# EAGLE board freeduino-dual-motor-driver (EAGLE 4.16)
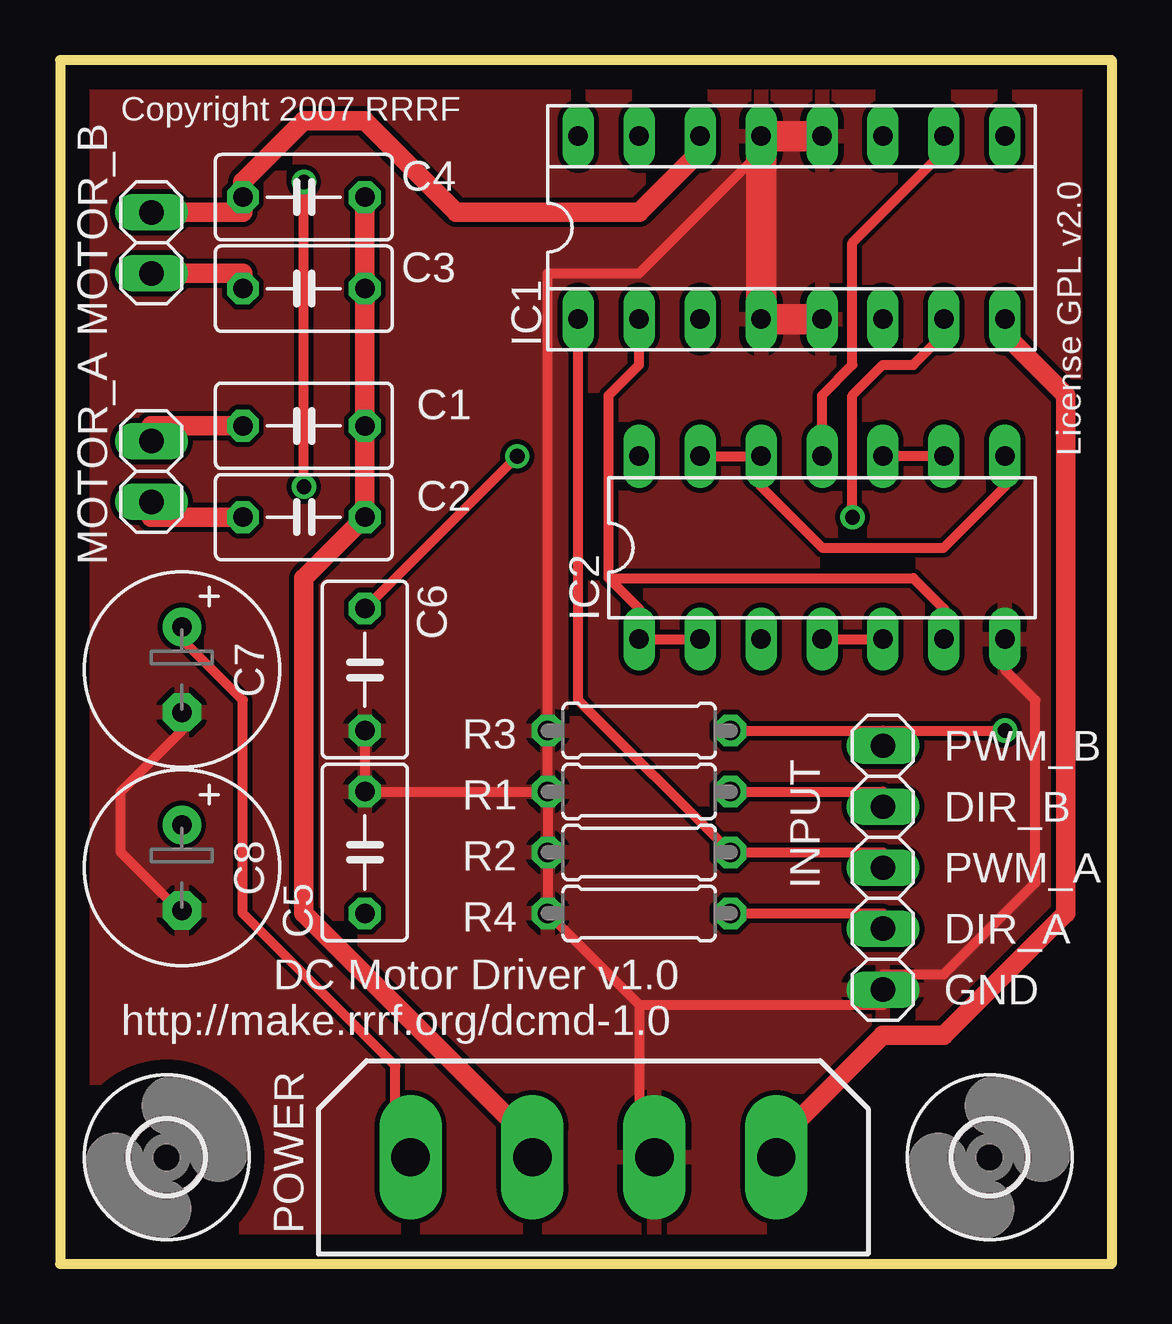
[diagram p0: board, top side]
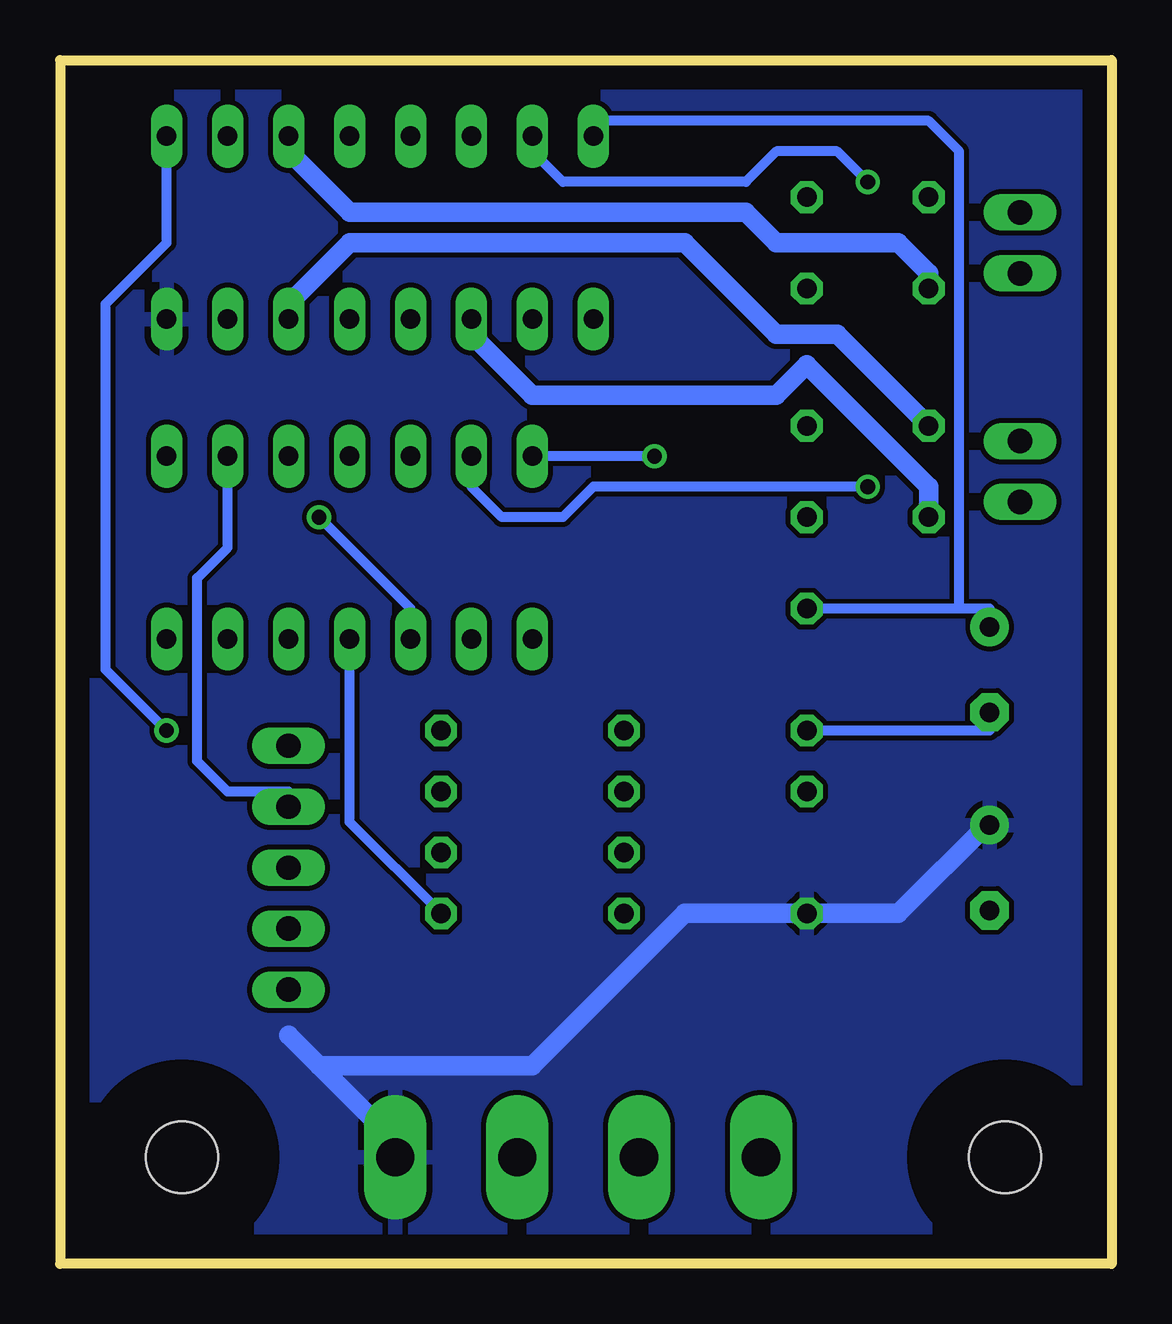
[diagram p1: board, bottom side, seen from below]

Size 43.82 x 50.16 mm. Coordinates in mm from the lower left corner, seen from the top.
Outline: 43.82,50.16 0,50.16 0,0 43.82,0 43.82,50.16
Copper layers (1*16): Top 0.035mm / dielectric 1.5mm / Bottom 0.035mm
Design rules "default": minimum track width 10mil, minimum drill 24mil, track to track 8mil, track to pad 8mil, pad to pad 8mil, via to via 8mil, smd to smd 8mil, copper to edge 40mil, drill to drill 8mil, minimum pad ring 10mil, minimum via ring 8mil, stop-mask expansion 4mil, vias tented up to drill 0mil, thermal gap 10mil
Net classes: 0 default: width 0.406 mm, drill 0.381 mm; 1 power: width 0.813 mm, drill 0.381 mm

## Footprints (pad centres in the part's own frame; a part is rotated, then mirrored left to right if it is on the bottom)
C050-035X075 = drill 0.813 octagon: 1 -2.54,0; 2 2.54,0
E3,5-8 = drill 0.813 pad 1.6 round: + -1.778,0 | drill 0.813 pad 1.6 octagon: - 1.778,0
3,0 = hole 3: 0,0
SOCKED-16 = drill 0.813 long: 1 -8.89,-3.81; 2 -6.35,-3.81; 3 -3.81,-3.81; 4 -1.27,-3.81; 5 1.27,-3.81; 6 3.81,-3.81; 7 6.35,-3.81; 8 8.89,-3.81; 9 8.89,3.81; 10 6.35,3.81; 11 3.81,3.81; 12 1.27,3.81; 13 -1.27,3.81; 14 -3.81,3.81; 15 -6.35,3.81; 16 -8.89,3.81
DIL14 = drill 0.813 long: 1 -7.62,-3.81; 2 -5.08,-3.81; 3 -2.54,-3.81; 4 0,-3.81; 5 2.54,-3.81; 6 5.08,-3.81; 7 7.62,-3.81; 8 7.62,3.81; 9 5.08,3.81; 10 2.54,3.81; 11 0,3.81; 12 -2.54,3.81; 13 -5.08,3.81; 14 -7.62,3.81
1X05 = drill 1.016 long: 1 -5.08,0; 2 -2.54,0; 3 0,0; 4 2.54,0; 5 5.08,0
1X02 = drill 1.016 long: 1 -1.27,0; 2 1.27,0
9090-4V = drill 1.6 pad 2.6 long: 1 -7.62,0; 2 -2.54,0; 3 2.54,0; 4 7.62,0
0207/7 = drill 0.813 octagon: 1 -3.81,0; 2 3.81,0

## Placement (x,y rotation side)
C1  100nF  [C050-035X075]  10.16,34.92 0 top
C2  100nF  [C050-035X075]  10.16,31.11 0 top
C3  100nF  [C050-035X075]  10.16,40.64 0 top
C4  100nF  [C050-035X075]  10.16,44.45 0 top
C5  100nF  [C050-035X075]  12.7,17.14 90 top
C6  100nF  [C050-035X075]  12.7,24.77 270 top
C7  100uF  [E3,5-8]  5.08,24.77 270 top
C8  100uF  [E3,5-8]  5.08,16.51 270 top
H1  MOUNT-HOLE3.0  [3,0]  4.45,4.45 0 top
H2  MOUNT-HOLE3.0  [3,0]  38.73,4.45 0 top
IC1  L293D  [SOCKED-16]  30.48,43.18 0 top
IC2  74HC00N  [DIL14]  31.75,29.84 0 top
INPUT  [1X05]  34.29,16.51 90 top
MOTOR_A  [1X02]  3.81,33.02 90 top
MOTOR_B  [1X02]  3.81,42.55 90 top
POWER  9090-4V  [9090-4V]  22.23,4.45 0 top
R1  100K  [0207/7]  24.13,19.68 180 top
R2  100K  [0207/7]  24.13,17.14 180 top
R3  100K  [0207/7]  24.13,22.22 180 top
R4  100K  [0207/7]  24.13,14.6 180 top

## Library data of the parts
C1-C8 R1-R4 = rcl
H1 H2 = holes
IC1 = ic-package
IC2 = 74xx-eu
INPUT MOTOR_A MOTOR_B = pinhead
POWER = con-thomas-betts

## Nets
DIR_A: IC2.4 IC2.5 INPUT.2 R4.1
DIR_B: IC2.9 IC2.10 INPUT.4 R1.1
GND: C5.2 C6.2 C7.- C8.- IC1.4 IC1.5 IC1.12 IC1.13 IC2.7 INPUT.1 POWER.3 R1.2 R2.2 R3.2 R4.2
GNDA [power]: C1.2 C2.2 C3.2 C4.2 POWER.2
N$1: IC1.7 IC2.3
N$2: IC1.2 IC2.1 IC2.2 IC2.6
N$3: IC1.10 IC2.11
N$4: IC1.15 IC2.8 IC2.12 IC2.13
OUTA_1 [power]: C2.1 IC1.3 MOTOR_A.1
OUTA_2 [power]: C1.1 IC1.6 MOTOR_A.2
OUTB_1 [power]: C3.1 IC1.11 MOTOR_B.1
OUTB_2 [power]: C4.1 IC1.14 MOTOR_B.2
PWM_A: IC1.1 INPUT.3 R2.1
PWM_B: IC1.9 INPUT.5 R3.1
VCC: C6.1 C7.+ IC1.16 IC2.14 POWER.1
VSS [power]: C5.1 C8.+ IC1.8 POWER.4

## Tracks (layer width: path | path; a pad name or v marks a point on that pad's centre or on a via)
DIR_A
  Top 0.406: IC2.4 IC2.5 | R4.1 34.29,14.6 INPUT.2
  Bottom 0.406: R4.1 31.75,18.41 IC2.4
DIR_B
  Top 0.406: IC2.9 IC2.10 | R1.1 34.29,19.68 INPUT.4
  Bottom 0.406: IC2.9 36.83,29.84 38.1,28.57 38.1,20.95 36.83,19.68 34.29,19.68 INPUT.4
GND
  Top 0.406: IC2.7 39.37,24.77 40.64,23.49 40.64,15.88 36.83,12.06 34.29,12.06 INPUT.1 34.29,10.8 24.13,10.8 | C8.- 5.08,14.6 2.54,17.14 2.54,19.68 5.08,22.22 C7.- | R1.2 R3.2 20.32,41.27 24.13,41.27 29.21,46.35 | R1.2 C5.2 C6.2 | R1.2 R2.2 R4.2 24.13,10.8 | 24.13,10.8 24.13,5.71 POWER.3
  Top 1.27: IC1.12 IC1.13 29.21,46.35 IC1.4 IC1.5
  Bottom 0.406: C6.2 5.08,22.22 C7.-
  pour Top: 43.18,49.53 0.63,49.53 0.63,0.63 43.18,0.63
GNDA
  Top 0.813: C4.2 C3.2 C1.2 C2.2 10.16,28.57 10.16,14.6 19.05,5.71 POWER.2
N$1  (via drill 0.61)
  Top 0.406: v33.02,31.11 33.02,36.2 34.29,37.47 35.56,37.47 36.83,38.73 IC1.7
  Bottom 0.406: v33.02,31.11 29.21,27.3 IC2.3
N$2
  Top 0.406: IC2.2 IC2.1 24.13,27.3 22.86,28.57 | 22.86,28.57 22.86,36.2 24.13,37.47 IC1.2 | 22.86,28.57 35.56,28.57 36.83,27.3 IC2.6
N$3
  Top 0.406: IC2.11 31.75,36.2 33.02,37.47 33.02,42.55 36.83,46.35 IC1.10
N$4  (via drill 0.61)
  Top 0.406: IC2.13 IC2.12 29.21,32.38 31.75,29.84 36.83,29.84 39.37,32.38 IC2.8 | v10.16,32.38 v10.16,45.09
  Bottom 0.406: v10.16,45.09 11.43,46.35 13.97,46.35 15.24,45.09 22.86,45.09 24.13,46.35 IC1.15 | v10.16,32.38 21.59,32.38 22.86,31.11 25.4,31.11 26.67,32.38 IC2.13
OUTA_1
  Top 0.813: C2.1 3.81,31.11 MOTOR_A.1
  Bottom 0.813: C2.1 7.62,32.38 12.7,37.47 13.97,36.2 24.13,36.2 26.67,38.73 IC1.3
OUTA_2
  Top 0.813: C1.1 3.81,34.92 MOTOR_A.2
  Bottom 0.813: C1.1 11.43,38.73 13.97,38.73 17.78,42.55 31.75,42.55 34.29,40 IC1.6
OUTB_1
  Top 0.813: C3.1 7.62,41.27 MOTOR_B.1
  Bottom 0.813: IC1.11 34.29,46.35 31.75,43.81 15.24,43.81 13.97,42.55 8.89,42.55 7.62,41.27 C3.1
OUTB_2
  Top 0.813: MOTOR_B.2 7.62,43.81 C4.1 7.62,45.09 10.16,47.62 12.7,47.62 16.51,43.81 24.13,43.81 26.67,46.35 IC1.14
PWM_A
  Top 0.406: INPUT.3 34.29,17.14 R2.1 21.59,23.49 IC1.1
PWM_B  (via drill 0.61)
  Top 0.406: R3.1 34.29,22.22 | 34.29,22.22 v39.37,22.22 | 34.29,22.22 INPUT.5
  Bottom 0.406: v39.37,22.22 41.91,24.77 41.91,40 39.37,42.55 IC1.9
VCC  (via drill 0.61)
  Top 0.406: C6.1 v19.05,33.66 | POWER.1 13.97,5.71 13.97,8.26 7.62,14.6 7.62,23.49 5.08,26.04 C7.+
  Bottom 0.406: 6.35,27.3 5.08,27.3 C7.+ | 6.35,27.3 C6.1 | v19.05,33.66 IC2.14 | 6.35,27.3 6.35,46.35 7.62,47.62 21.59,47.62 IC1.16
VSS
  Top 0.813: IC1.8 39.37,38.73 41.91,36.2 41.91,14.6 36.83,9.52 34.29,9.52 30.48,5.71 POWER.4
  Bottom 0.813: C8.+ 5.08,18.41 8.89,14.6 C5.1 17.78,14.6 24.13,8.26 33.02,8.26 | 33.02,8.26 30.48,5.71 POWER.4 | 33.02,8.26 34.29,9.52
  pour Bottom: 43.18,0.63 43.18,49.53 0.63,49.53 0.63,0.63

## Text on the board
tPlace: Copyright 2007 RRRF | License GPL v2.0 | PWM_B | DIR_B | PWM_A | DIR_A | DC Motor Driver v1.0 | GND | http://make.rrrf.org/dcmd-1.0